# Altium PCB PCB.PcbDoc (part 1 of 3)
Units mm, origin at the board's own origin, x right, y up, seen from the top; angles counter-clockwise.
Board outline 116.97 x 81.03 mm, 4 copper layers (Top Layer, Int1 (GND), Int2 (PWR), Bottom Layer), stack 1.369 mm thick; 124 components, 94 nets, 431 pads, 1026 vias.
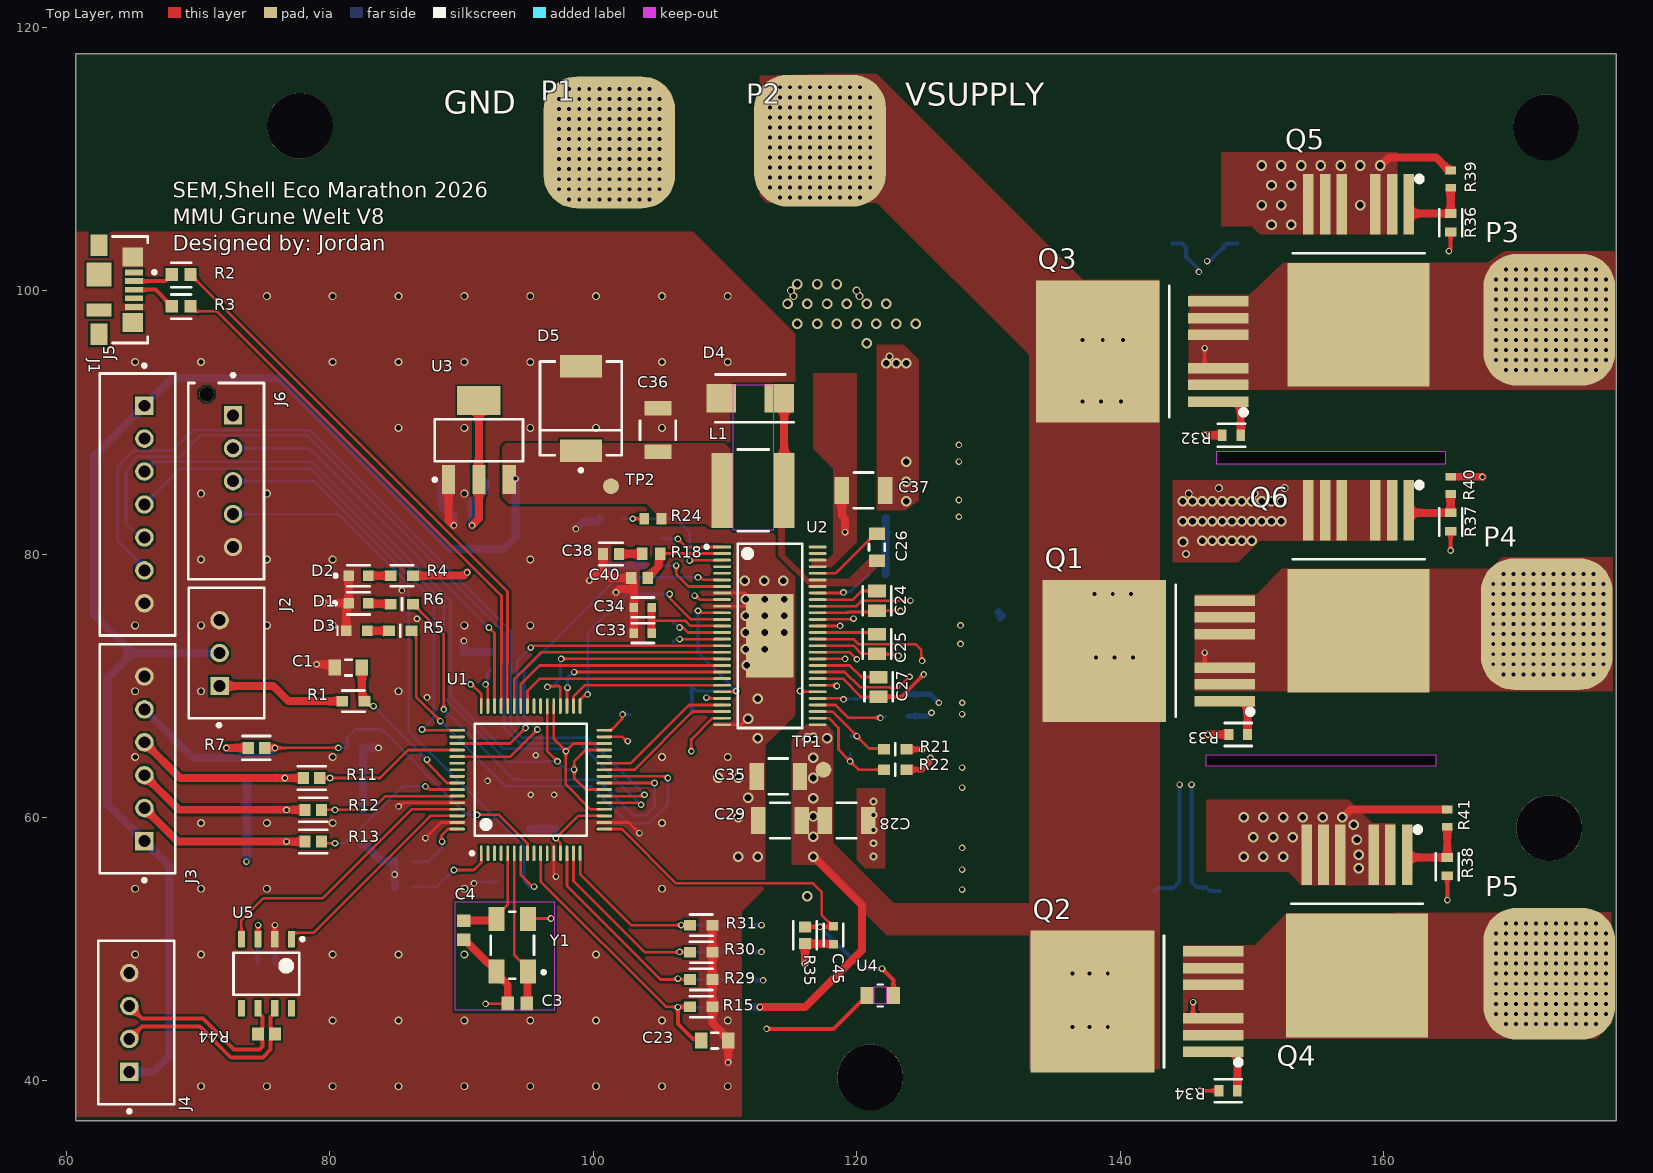
[diagram p0: Top Layer view]
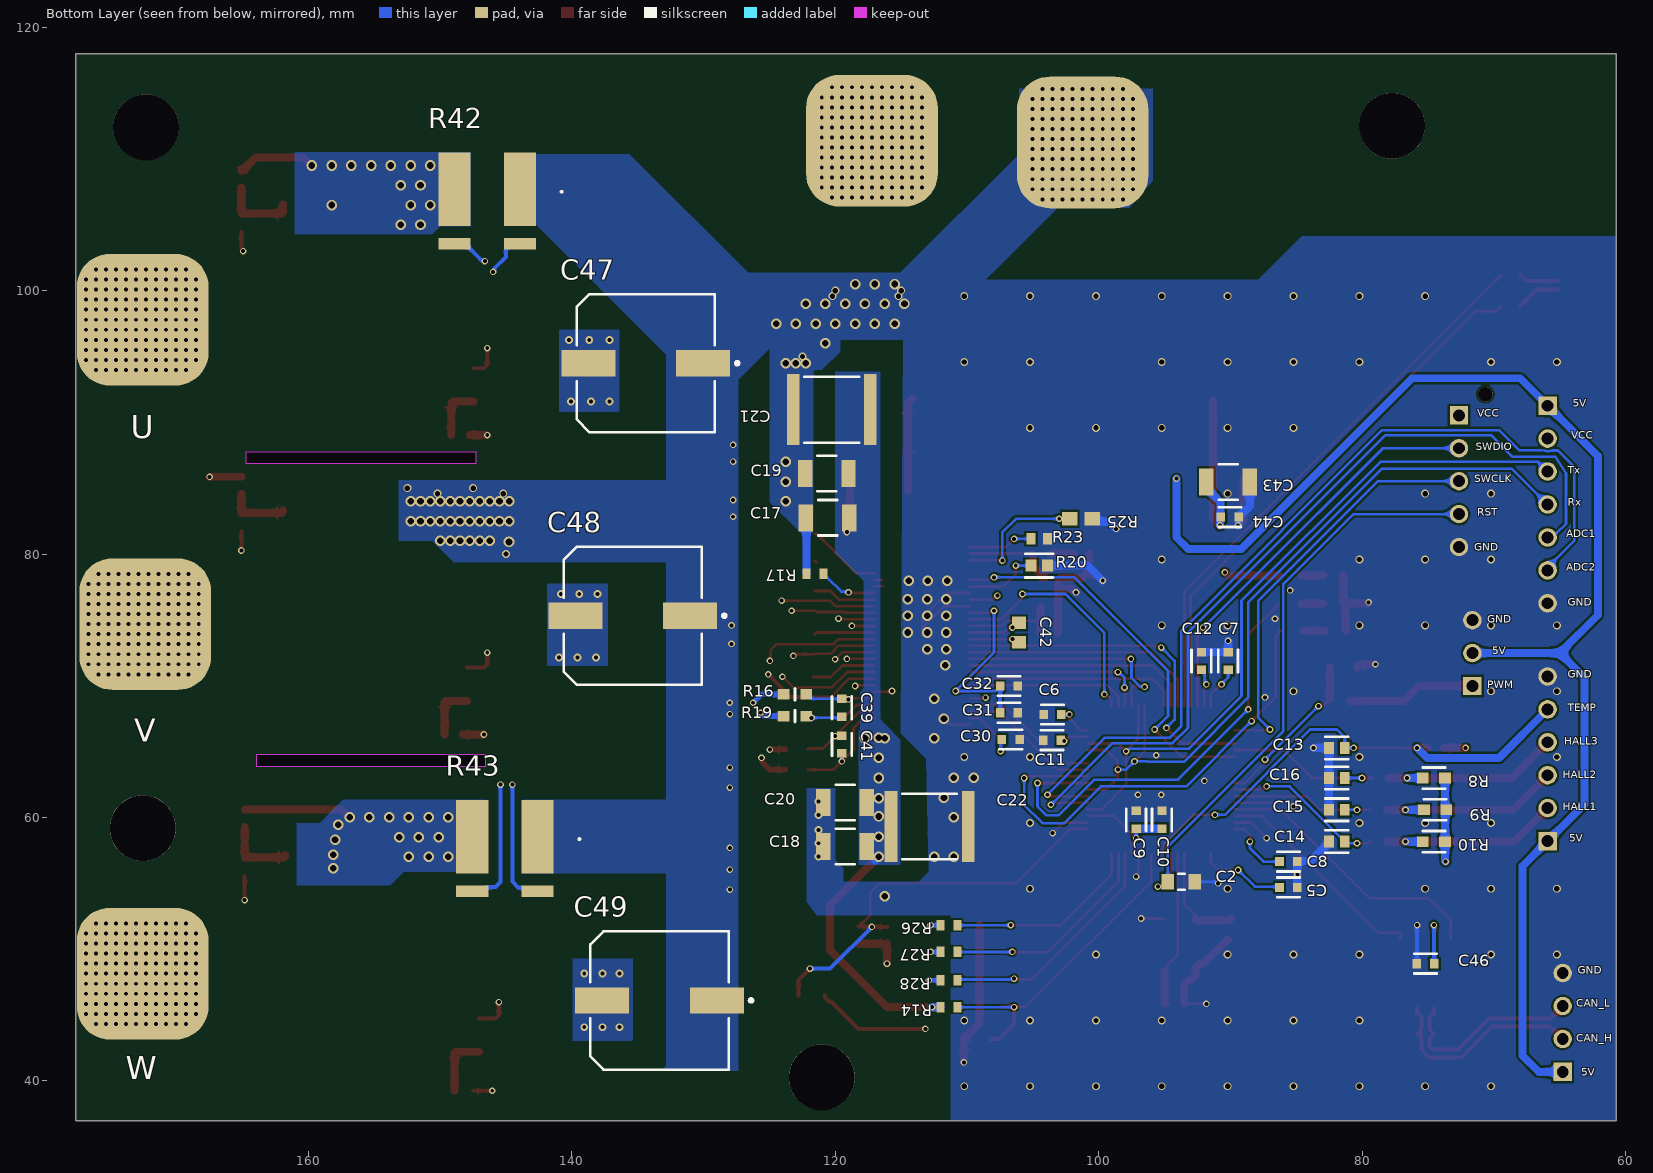
[diagram p1: Bottom Layer view, seen from below]
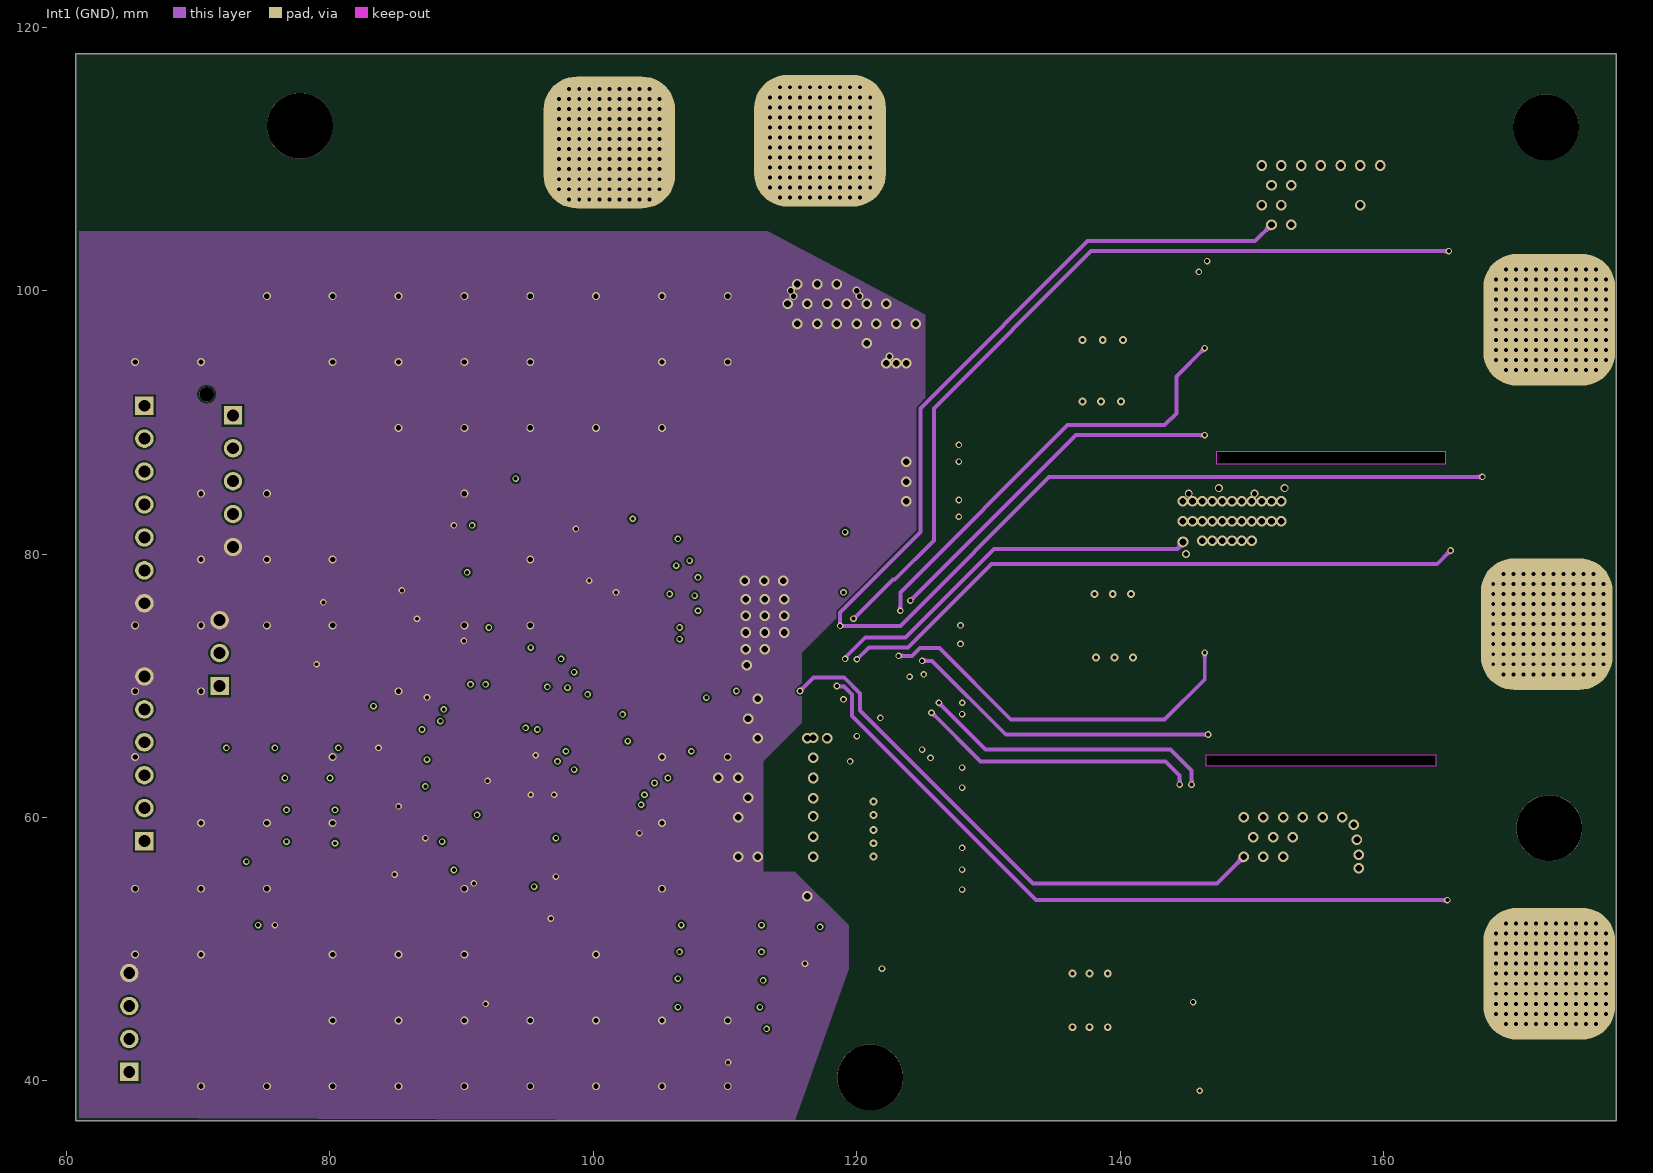
[diagram p2: Int1 (GND)]
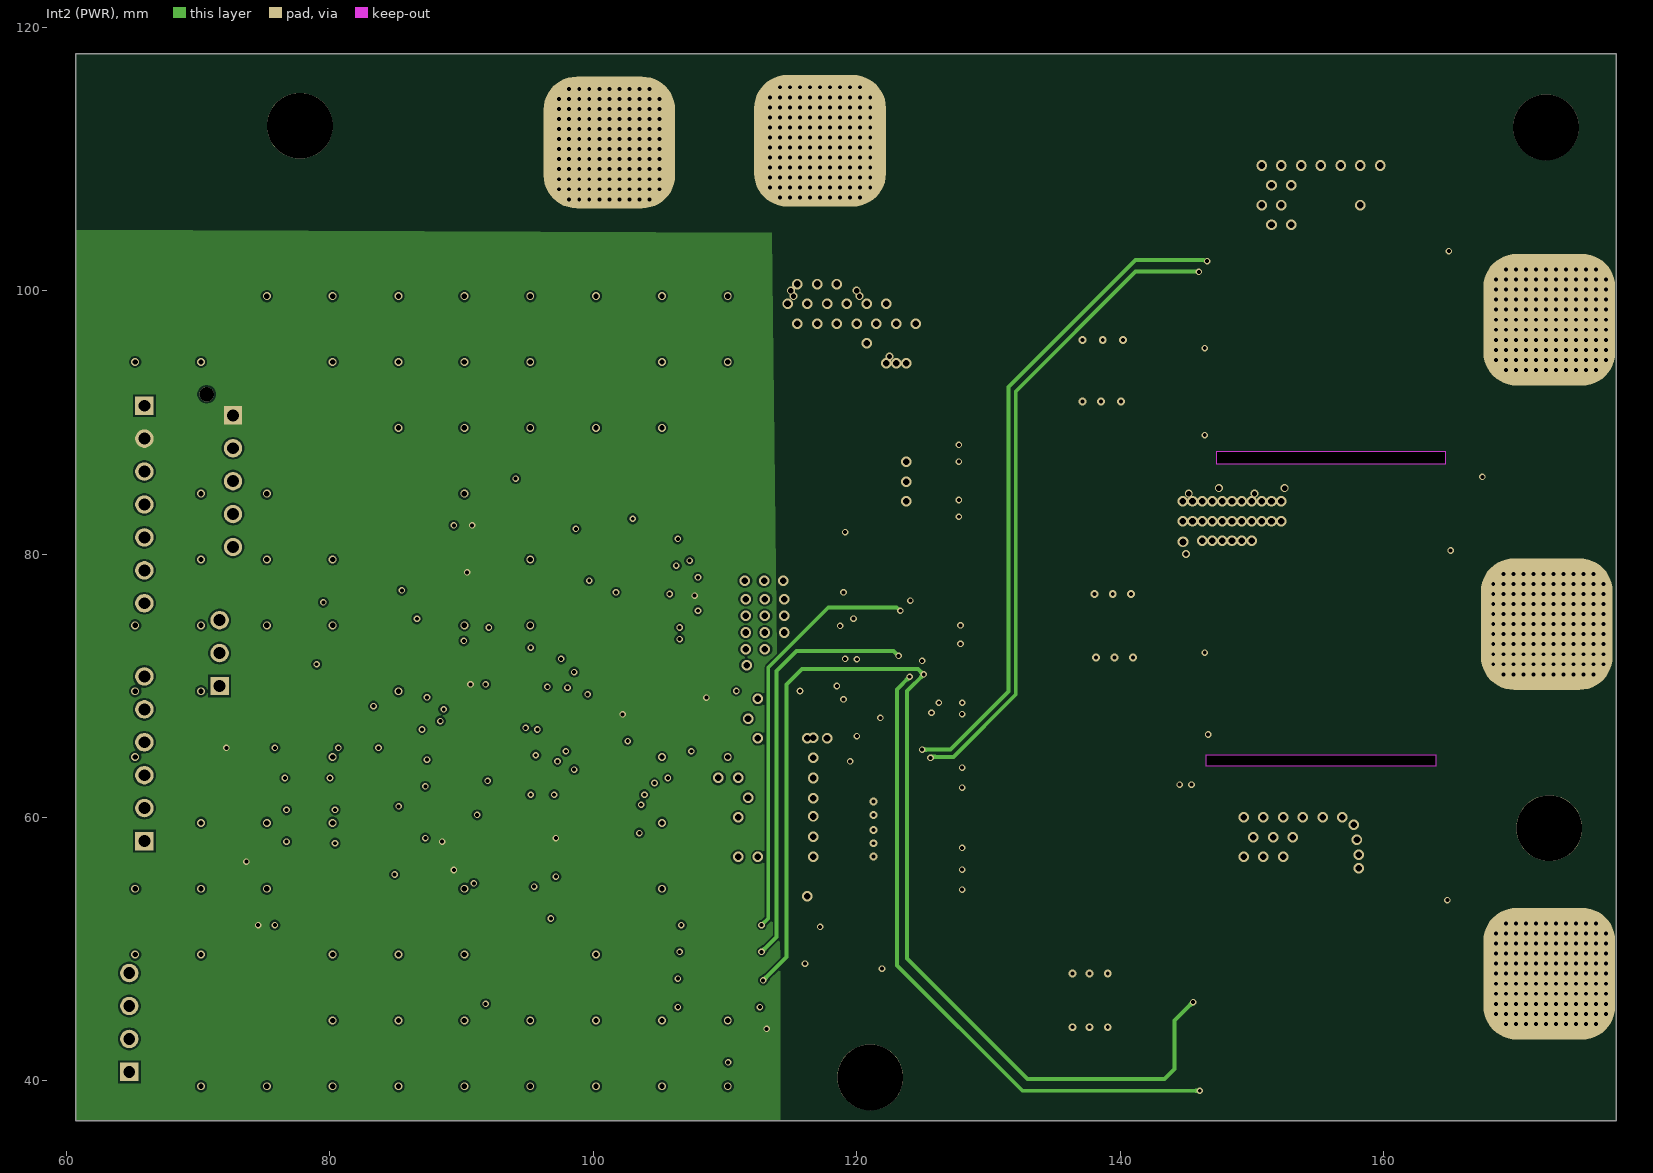
[diagram p3: Int2 (PWR)]
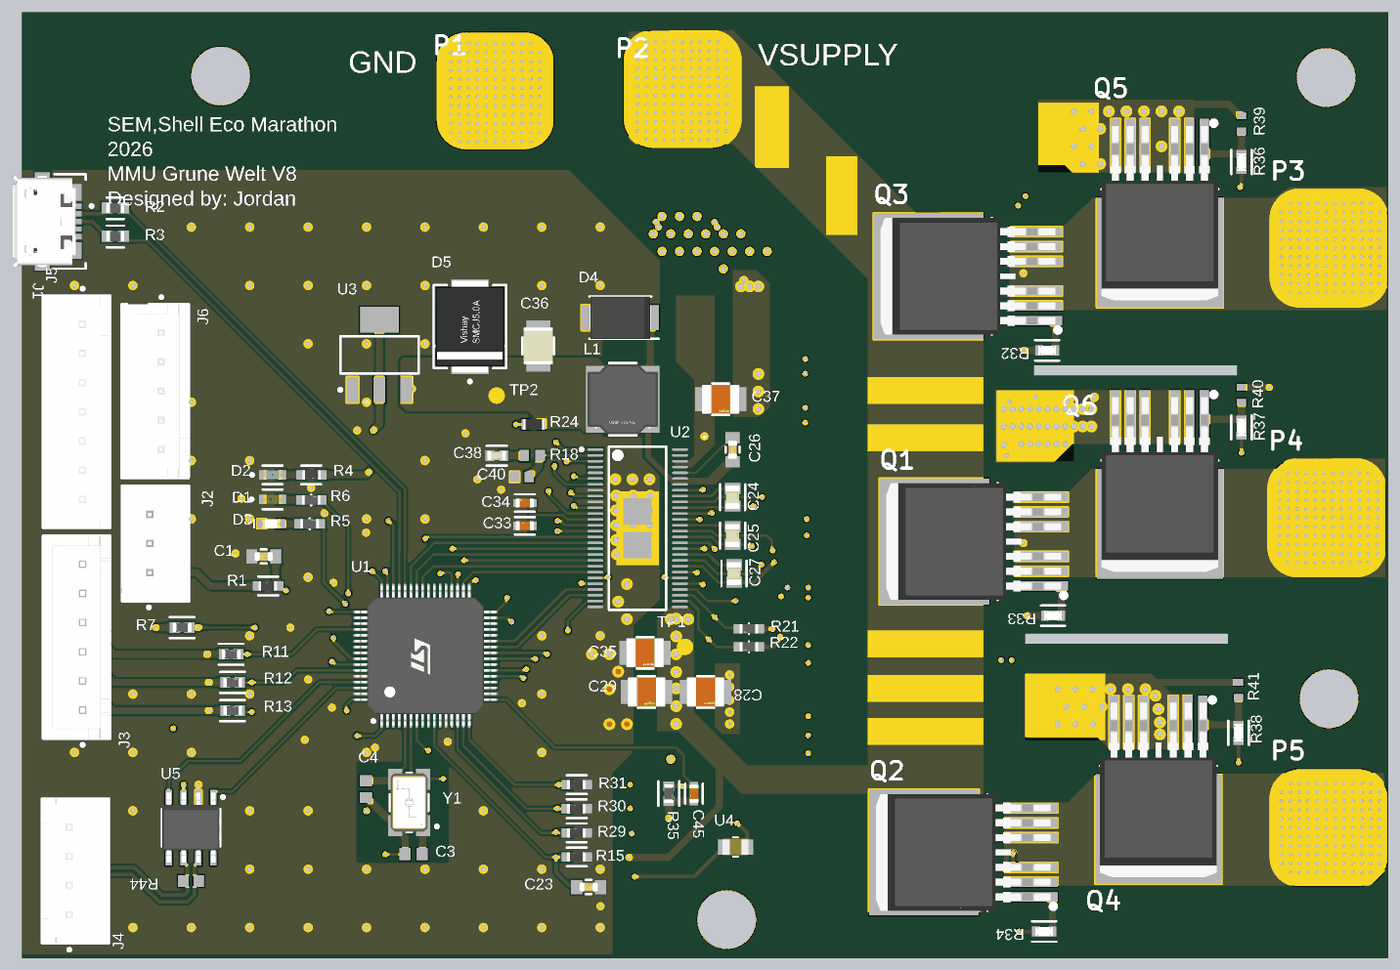
[diagram p5: 3D render of the assembled board from above, using the file's embedded part models]
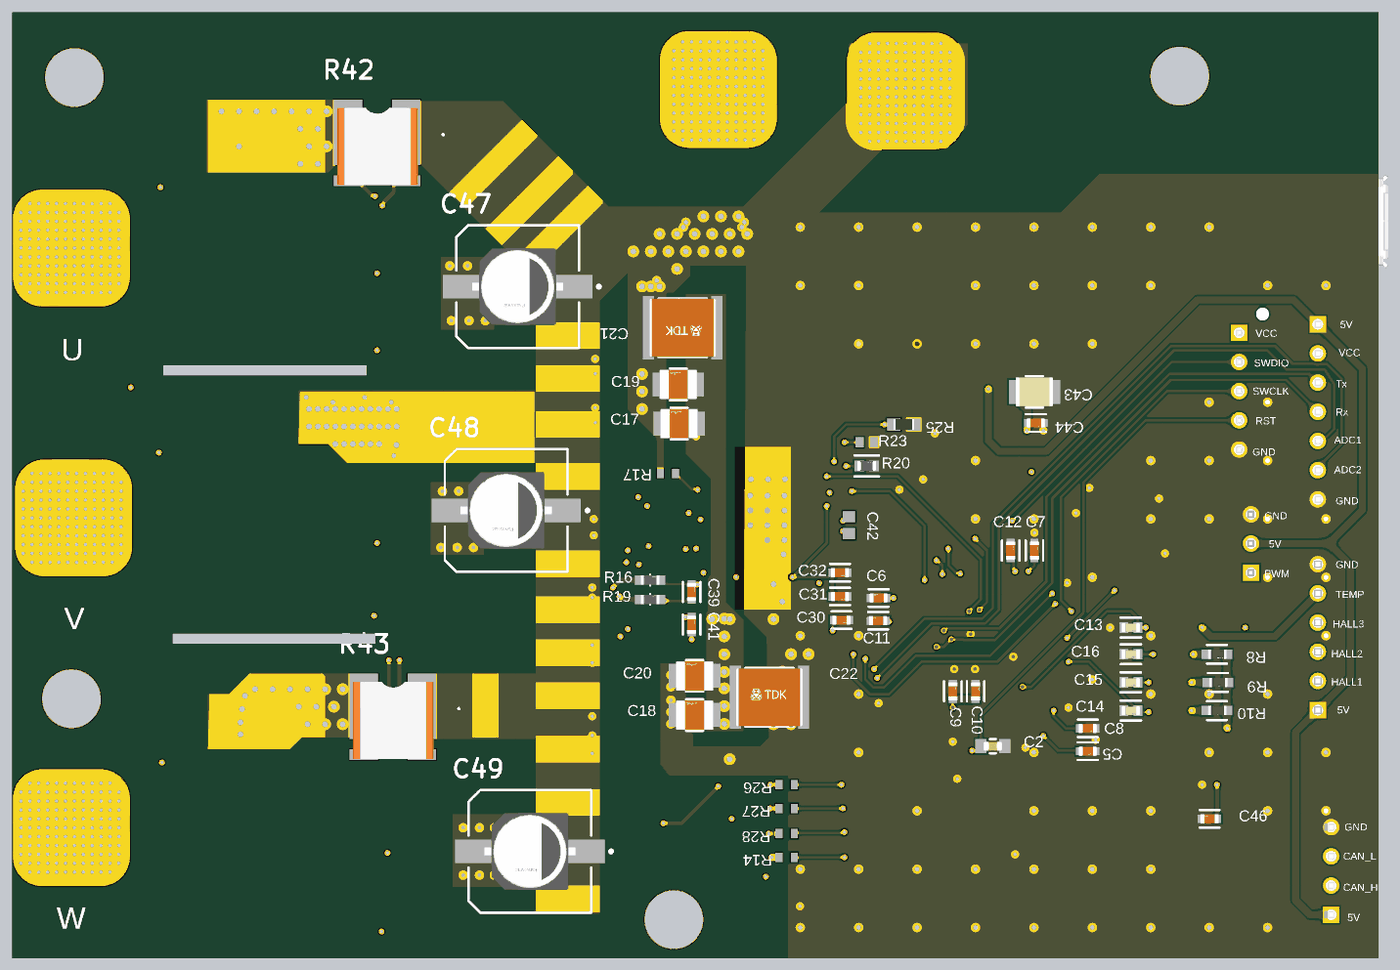
[diagram p6: 3D render of the assembled board from below, using the file's embedded part models]

## Layer stack, top to bottom
Top Solder: solder mask 0.0254, SM-001, Dk 4
Top Layer: signal copper 0.035
Dielectric 1: prepreg 0.1295, PP-017, Dk 4.3
Dielectric 2: prepreg 0.1295, PP-017, Dk 4.3
Int1 (GND): signal copper 0.035
Dielectric 3: core 0.7112, Core-039, Dk 4.8
Int2 (PWR): signal copper 0.035
Dielectric 4: prepreg 0.1295, PP-017, Dk 4.3
Dielectric 5: prepreg 0.1295, PP-017, Dk 4.3
Bottom Layer: signal copper 0.035
Bottom Solder: solder mask 0.0254, SM-001, Dk 4

## Board outline
60.706,36.957 177.673,36.957 177.673,117.983 60.706,117.983
cut-out: 146.558,64.77 163.957,64.77 163.957,63.881 146.558,63.881
cut-out: 164.719,87.757 147.32,87.757 147.32,86.868 164.719,86.868

## Design rules (kind name [scope] priority, off if disabled: settings)
Clearance [All] p1: gap=0.15 ignorepadtopadclearanceinfootprint=TRUE except(0.2: Fill-Fill Fill-Poly Fill-Region Poly-Poly Poly-Region Region-Region)
Creepage [All] p1: checkdistance=0.1 applytopolygonpour=TRUE
DiffPairsRouting [All] p1: maxlimit=0.6 minlimit=0.254 mostfreqgap=0.3 toplayer_minwidth=0.2 toplayer_maxwidth=0.4 toplayer_prefwidth=0.3 midlayer1_minwidth=0.2 midlayer1_maxwidth=0.4 midlayer1_prefwidth=0.3 midlayer2_minwidth=0.2 midlayer2_maxwidth=0.4 midlayer2_prefwidth=0.3 bottomlayer_minwidth=0.2 bottomlayer_maxwidth=0.4 bottomlayer_prefwidth=0.3 maxuncoupledlength=12.7
PlaneClearance [All] p1: clearance=0.6
PlaneConnect [All] p1: planeconnectstyle=Direct reliefexpansion=0.508 reliefentries=4 reliefconductorwidth=0.254 reliefairgap=0.254
PolygonConnect [All] p1: connectstyle=Direct reliefconductorwidth=0.254 reliefentries=4 polygonreliefangle="90 Angle" airgapwidth=0.2
RoutingVias [All] p1: holewidth=0.5 width=0.7 viastyle="Through Hole" minholewidth=0.3 minwidth=0.5 maxholewidth=0.7 maxwidth=1.27
SolderMaskExpansion [All] p1: expansion=0.102 istentingtop=FALSE
Width [All] p1: maxlimit=0.6 minlimit=0.2 preferedwidth=0.3
27 further rules are at their usual default settings.

## Classes and differential pairs
component class "Power Stage": C45 C47 C48 C49 Q1 Q2 Q3 Q4 Q5 Q6 R32 R33 R34 R35 R36 R37 R38 R39 R40 R41 R42 R43 U4
component class MCU: C2 C3 C4 C5 C6 C7 C8 C9 C10 C11 C12 U1 Y1
component class HALL_SENSOR_FILTER: C13 C14 C15 C16 R7 R8 R9 R10 R11 R12 R13
component class General: C1 D1 D2 D3 J1 J2 J3 J4 J5 J6 P1 P2 P3 P4 P5 R1 R2 R3 R4 R5 R6
component class "GATE Driver": C17 C18 C19 C20 C21 C22 C23 C24 C25 C26 C27 C28 C29 C30 C31 C32 C33 C34 C35 C36 C37 C38 C39 C40 C41 C42 C43 C44 D4 D5 L1 R14 R15 R16 R17 R18 R19 R20 R21 R22 R23 R24 R25 R26 R27 R28 R29 R30 R31 TP1 TP2 U2 U3
component class CAN: C46 R44 U5
differential pair USB: +USB_P -USB_N
differential pair CURR_2: +CURR_2_P -CURR_2_N
differential pair CURR_1: +CURR_1_P -CURR_1_N
differential pair CAN: +CAN_P -CAN_N

## Components (designator, comment, footprint, x,y, rotation, side; value= is the part's Value field where it differs from the comment)
C1 "CGA3E2X7R1H104K080AA" FP-CGA3E-0_3-0_1-IPC_A 81.407,71.374 r180 top
C2 "CGA3E2X7R1H104K080AA" FP-CGA3E-0_3-0_1-IPC_A 93.726,55.118 r180 bottom
C3 "GRM1885C1H150JA01D" CAPC1608X90X35ML10T15 94.234,45.863 r0 top
C4 "GRM1885C1H150JA01D" CAPC1608X90X35ML10T15 90.17,51.435 r90 top
C5 "GRM188R71A225KE15D" FP-GRM188-0_1-e0_2_0_5-MFG 85.598,54.688 r180 bottom
C6 "GRM188R71A225KE15D" FP-GRM188-0_1-e0_2_0_5-MFG 103.505,67.818 r0 bottom
C7 "GRM188R71A225KE15D" FP-GRM188-0_1-e0_2_0_5-MFG 90.17,71.882 r90 bottom
C8 "GRM188R71A225KE15D" FP-GRM188-0_1-e0_2_0_5-MFG 85.598,56.642 r180 bottom
C9 "GRM188R71A225KE15D" FP-GRM188-0_1-e0_2_0_5-MFG 97.155,59.817 r90 bottom
C10 "GRM188R71A225KE15D" FP-GRM188-0_1-e0_2_0_5-MFG 95.201,59.817 r90 bottom
C11 "GRM188R71A225KE15D" FP-GRM188-0_1-e0_2_0_5-MFG 103.545,65.864 r0 bottom
C12 "2u2" FP-GRM188-0_1-e0_2_0_5-MFG 92.202,71.882 r90 bottom
C13 "C0603C472J5RACTU" FP-C0603C-CF-MFG 81.915,65.278 r0 bottom value="4,700 pF"
C14 "C0603C472J5RACTU" FP-C0603C-CF-MFG 81.915,58.166 r0 bottom value="4,700 pF"
C15 "C0603C472J5RACTU" FP-C0603C-CF-MFG 81.915,60.579 r0 bottom value="4,700 pF"
C16 "C0603C472J5RACTU" FP-C0603C-CF-MFG 81.915,62.992 r0 bottom value="4,700 pF"
C17 "GRM32ER71J106KA12L" FP-GRM32E-0_2-0_3-MFG 120.579,82.752 r0 bottom
C18 "GRM32ER71J106KA12L" FP-GRM32E-0_2-0_3-MFG 119.253,57.785 r0 bottom
C19 "GRM32ER71J106KA12L" FP-GRM32E-0_2-0_3-MFG 120.65,86.106 r0 bottom
C20 "GRM32ER71J106KA12L" FP-GRM32E-0_2-0_3-MFG 119.253,61.139 r0 bottom
C21 "C5750X7S2A156M250KB" FP-C5750-250-0_4-IPC_B 120.269,90.962 r0 bottom
C22 "C5750X7S2A156M250KB" FP-C5750-250-0_4-IPC_B 112.847,59.309 r180 bottom
C23 "CGA3E2X7R1H104K080AA" FP-CGA3E-0_3-0_1-IPC_A 109.22,43.053 r0 top
C24 "C0805C224K1RACTU" FP-C0805C-DN-MFG 121.539,76.442 r270 top value="0.22 μF"
C25 "C0805C224K1RACTU" FP-C0805C-DN-MFG 121.539,73.164 r270 top value="0.22 μF"
C26 "CGA3E2X7R1H104K080AA" FP-CGA3E-0_3-0_1-IPC_A 121.539,80.518 r270 top
C27 "C0805C224K1RACTU" FP-C0805C-DN-MFG 121.666,69.91 r270 top value="0.22 μF"
C28 "GRM32ER71J106KA12L" FP-GRM32E-0_2-0_3-MFG 119.227,59.765 r0 top
C29 "GRM32ER71J106KA12L" FP-GRM32E-0_2-0_3-MFG 114.173,59.765 r0 top
C30 "GRM188R71A225KE15D" FP-GRM188-0_1-e0_2_0_5-MFG 106.68,65.913 r180 bottom
C31 "GRM188R71A225KE15D" FP-GRM188-0_1-e0_2_0_5-MFG 106.807,67.945 r180 bottom
C32 "GRM188R71A225KE15D" FP-GRM188-0_1-e0_2_0_5-MFG 106.807,69.977 r180 bottom
C33 "GRM188R71A225KE15D" FP-GRM188-0_1-e0_2_0_5-MFG 103.759,73.992 r180 top
C34 "GRM188R71A225KE15D" FP-GRM188-0_1-e0_2_0_5-MFG 103.759,75.946 r180 top
C35 "GRM32ER71J106KA12L" FP-GRM32E-0_2-0_3-MFG 114.047,63.119 r0 top
C36 "GRM32ER60J107ME20L" FP-GRM32-0_3-MFG 104.902,89.408 r90 top value=100uF
C37 "GRM32ER71J106KA12L" FP-GRM32E-0_2-0_3-MFG 120.523,84.836 r0 top
C38 "C0603C682J5GACTU" FP-C0603C-CF-MFG 101.346,80.01 r180 top value="6,800 pF"
C39 "GRM1885C1H222JA01D" FP-GRM188-0_1-e0_2_0_5-MFG 119.507,68.326 r90 bottom
C40 "C0603C121J5GACTU" CAPC1608X87X35LL15T15 103.505,78.181 r180 top
C41 "GRM1885C1H222JA01D" FP-GRM188-0_1-e0_2_0_5-MFG 119.507,65.532 r90 bottom
C42 "GRM188R71H223KA01D" CAPC1608X90X35ML10T15 106.045,74.041 r90 bottom
C43 "GRM32ER60J107ME20L" FP-GRM32-0_3-MFG 90.17,85.471 r180 bottom value=100uF
C44 "GRM188R71A225KE15D" FP-GRM188-0_1-e0_2_0_5-MFG 90.043,82.804 r180 bottom
C45 "2u2" FP-GRM188-0_1-e0_2_0_5-MFG 118.237,51.054 r270 top
C46 "GRM188R71A225KE15D" FP-GRM188-0_1-e0_2_0_5-MFG 75.184,48.895 r0 bottom
C47 "EEEFK1J101P" FP-FKG-MFG 134.398,94.488 r0 bottom
C48 "EEEFK1J101P" FP-FKG-MFG 135.382,75.311 r0 bottom
C49 "EEEFK1J101P" FP-FKG-MFG 133.35,46.101 r0 bottom
D1 "LTST-C190GKT" FP-LTST-C190GKT-MFG 82.169,76.255 r0 top
D2 "LTST-C191TBKT" FP-LTST-C191TBKT-MFG 82.169,78.359 r0 top
D3 "150060RS75000" WL-SMCW_0603_150060xx75000 82.042,74.168 r0 top
D4 "B280-13-F" DIOM5336X250N 111.928,91.821 r180 top
D5 "SMCJ5.0A-E3/57T" FP-95402-MFG 99.06,91.059 r90 top
J1 "473460001" FP-473460001-MFG 62.82,100.069 r270 top
J2 "B3B-XH-A(LF)(SN)" FP-B3B-XH-A_LF_SN-MFG 72.153,72.477 r90 top
J3 "B6B-XH-A(LF)(SN)" FP-B6B-XH-A_LF_SN-MFG 65.388,64.456 r90 top
J4 "B4B-XH-A(LF)(SN)" FP-B4B-XH-A_LF_SN-MFG 65.295,44.43 r270 top
J5 "B7B-XH-A(LF)(SN)" FP-B7B-XH-A_LF_SN-MFG 65.388,83.761 r90 top
J6 "B5B-XH-AM(LF)(SN)" FP-B5B-XH-AM_LF_SN-MFG 72.119,85.531 r90 top
L1 "NR6045T220M" FP-NR6045-MFG 112.141,84.836 r180 top
P1 "Power_Pad" POWERPAD 101.219,111.252 r0 top
P2 "Power_Pad" POWERPAD 117.221,111.379 r0 top
P3 "Power_Pad" POWERPAD 172.593,97.79 r90 top
P4 "Power_Pad" POWERPAD 172.403,74.676 r90 top
P5 "Power_Pad" POWERPAD 172.593,48.133 r90 top
Q1 "IPB010N06N" PG-TO263-7-3_3 138.805,72.644 r90 top
Q2 "IPB010N06N" PG-TO263-7-3_3 137.916,46.015 r90 top
Q3 "IPB010N06N" PG-TO263-7-3_3 138.303,95.377 r90 top
Q4 "IPB010N06N" PG-TO263-7-3_3 157.988,48.006 r180 top
Q5 "IPB010N06N" PG-TO263-7-3_3 158.115,97.409 r180 top
Q6 "IPB010N06N" PG-TO263-7-3_3 158.115,74.168 r180 top
R1 "RT0603BRD072K2L" FP-RT0603-MFG 81.788,68.834 r180 top value=2.2KΩ
R2 "CRCW060322R0FKEA" FP-CRCW0603-e3-IPC_B 68.707,101.219 r0 top
R3 "CRCW060322R0FKEA" FP-CRCW0603-e3-IPC_B 68.707,98.806 r0 top
R4 "RT0603BRD072K2L" FP-RT0603-MFG 85.471,78.359 r0 top value=2.2KΩ
R5 "RC0603FR-07100RL" FP-RC0603-0_55-MFG 85.344,74.168 r0 top
R6 "RC0603FR-07100RL" FP-RC0603-0_55-MFG 85.471,76.2 r0 top
R7 "ERA-3AEB103V" FP-ERA3A-IPC_C 74.422,65.278 r180 top
R8 "RT0603BRD072K2L" FP-RT0603-MFG 74.549,62.992 r180 bottom value=2.2KΩ
R9 "RT0603BRD072K2L" FP-RT0603-MFG 74.461,60.579 r180 bottom value=2.2KΩ
R10 "RT0603BRD072K2L" FP-RT0603-MFG 74.549,58.166 r180 bottom value=2.2KΩ
R11 "ERA-3AEB103V" FP-ERA3A-IPC_C 78.613,62.992 r0 top
R12 "ERA-3AEB103V" FP-ERA3A-IPC_C 78.74,60.579 r0 top
R13 "ERA-3AEB103V" FP-ERA3A-IPC_C 78.74,58.166 r0 top
R14 "RC0603FR-0739KL" RESC1608X55X25LL10T15 111.379,45.593 r0 bottom
R15 "RT0603BRD072K2L" FP-RT0603-MFG 108.204,45.624 r180 top value=2.2KΩ
R16 "RC0603FR-07100RL" FP-RC0603-0_55-MFG 123.063,69.342 r180 bottom
R17 "RC0603FR-071ML" RESC1608X55X25LL10T15 121.539,78.486 r0 bottom
R18 "ERJ-3EKF1502V" RESC1608X55X30NL15T15 104.394,80.01 r180 top
R19 "RC0603FR-07100RL" FP-RC0603-0_55-MFG 123.063,67.691 r180 bottom
R20 "ERA-3AEB103V" FP-ERA3A-IPC_C 104.521,79.121 r180 bottom
R21 "RC0603FR-07100RL" FP-RC0603-0_55-MFG 122.936,65.181 r180 top
R22 "RC0603FR-07100RL" FP-RC0603-0_55-MFG 122.936,63.627 r180 top
R23 "ERJ-3GEYJ224V" RESC1608X55X30LL15T15#1 104.521,81.153 r180 bottom
R24 "ERJ3EKF1802V" RESC1608X55X30LL15T15#2 104.521,82.677 r0 top
R25 "ERJ-3EKF3301V" RESC1609X55X30ML15T15 101.346,82.677 r0 bottom
R26 "RC0603FR-0739KL" RESC1608X55X25LL10T15 111.379,51.816 r0 bottom
R27 "RC0603FR-0739KL" RESC1608X55X25LL10T15 111.379,49.784 r0 bottom
R28 "RC0603FR-0739KL" RESC1608X55X25LL10T15 111.379,47.625 r0 bottom
R29 "RT0603BRD072K2L" FP-RT0603-MFG 108.204,47.693 r180 top value=2.2KΩ
R30 "RT0603BRD072K2L" FP-RT0603-MFG 108.204,49.754 r180 top value=2.2KΩ
R31 "RT0603BRD072K2L" FP-RT0603-MFG 108.204,51.816 r180 top value=2.2KΩ
R32 "ERJ-PA3J4R7V" FP-ERJPA3-IPC_C 148.463,89.027 r0 top
R33 "ERJ-PA3J4R7V" FP-ERJPA3-IPC_C 148.971,66.294 r0 top
R34 "4R7" FP-ERJPA3-IPC_C 148.209,39.243 r0 top
R35 "10k" FP-ERA3A-IPC_C 116.078,51.054 r270 top
R36 "ERJ-PA3J4R7V" FP-ERJPA3-IPC_C 165.1,105.156 r90 top
R37 "ERJ-PA3J4R7V" FP-ERJPA3-IPC_C 165.1,82.423 r90 top
R38 "ERJ-PA3J4R7V" FP-ERJPA3-IPC_C 164.846,56.261 r90 top
R39 "RC0603FR-0739KL" RESC1608X55X25LL10T15 165.1,108.458 r90 top
R40 "RC0603FR-0739KL" RESC1608X55X25LL10T15 165.1,85.217 r270 top
R41 "RC0603FR-0739KL" RESC1608X55X25LL10T15 164.846,59.944 r90 top
R42 "WSLP27265L000FEA" WSLP27265L000FEA 146.431,106.807 r0 bottom
R43 "WSLP27265L000FEA" WSLP27265L000FEA 145.086,57.645 r0 bottom
R44 "ERA-3AEB121V" RESC1608X55X30NL20T20 75.184,43.561 r180 top
TP1 "Test point" "TEST POINT" 111.887,66.421 r90 top
TP2 "Test point" "TEST POINT" 95.758,87.947 r90 top
U1 "STM32F405RGT6TR" FP-LQFP64-5W-IPC_C 95.25,62.865 r90 top
U2 "DRV8302DCAR" FP-DCA0056A-IPC_C 113.411,73.787 r0 top
U3 "TC2117-3.3VDBTR" SOT-223-DB3_N 91.313,88.646 r90 top
U4 "NTCS0805E3103GMT" NTCS0805_VIS 121.793,46.482 r180 top
U5 "SN65HVD232D" D0008A_L 75.184,48.133 r270 top
Y1 "ABM3B-8.000MHZ-10-1-U-T" FP-ABM3B-MFG 93.853,50.292 r90 top

## Footprints (in the part's own frame and the unit in brackets; to place one, negate y for a bottom-side part, rotate by r counter-clockwise, add the part's x,y. Pads: shape width x height; smd on the part's side, far side on the other; paste and mask are expansions set on the pad)
CAPC1608X87X35LL15T15 [mm] "Chip Capacitor, 2-Leads, Body 1.60x0.80mm, IPC High Density"
  rect 0.8x0.9 smd: 1(-0.625,0) 2(0.625,0)
  body extent -0.87,-0.48 0.87,0.48, height 0.87
CAPC1608X90X35ML10T15 [mm] "Chip Capacitor, 2-Leads, Body 1.60x0.80mm, IPC Low Density"
  rect 0.95x1.05 smd: 1(-0.725,0) 2(0.725,0)
  body extent -0.85,-0.45 0.85,0.45, height 0.9
D0008A_L [mm] "SOIC, 8-Leads, Body 5x4mm, Pitch 1.27mm, IPC High Density"
  rrect18% 1.25x0.55 smd: 1(-2.625,1.905) 2(-2.625,0.635) 3(-2.625,-0.635) 4(-2.625,-1.905) 5(2.625,-1.905) 6(2.625,-0.635) 7(2.625,0.635) 8(2.625,1.905)
  silkscreen extent -2.75,-2.5 1.6,2.86, body extent -3,-2.45 3,2.45, height 1.63
DIOM5336X250N [mm]
  rect 2.25x2.15 smd: 1(-2.2,0) 2(2.2,0)
  silkscreen extent -3.27,-1.81 2.65,1.81, body extent -2.65,-1.81 2.65,1.81, height 2.5
FP-95402-MFG [mm]
  rect 1.72x3.2 smd paste+0 mask+0: 1(-3.205,0) 2(3.205,0)
  silkscreen extent -4.82,-3.11 3.55,3.11, body extent -4.17,-3.21 4.17,3.21, height 0.25
FP-473460001-MFG [mm]
  rect 0.45x1.38 smd paste+0 mask+0: 1(-1.3,2.31) 2(-0.65,2.31) 3(0,2.31) 4(0.65,2.31) 5(1.3,2.31)
  rect 1.425x1.55 smd paste+0 mask+0: 6(-2.488,2.225) 7(2.488,2.225)
  rect 1.65x1.3 smd paste+0 mask+0: 8(-3.375,-0.35) 11(3.375,-0.35)
  rect 1.8x1.9 smd paste+0 mask+0: 9(-1.15,-0.35)
  rect 1x1.9 smd paste+0 mask+0: 10(1.55,-0.35)
  silkscreen extent -4.05,0.67 4.05,3.98, body extent -4.3,-2.48 4.3,3.45, height 0.25
FP-ABM3B-MFG [mm]
  rect 1.8x1.2 smd paste+0 mask+0: 1(-2,-1.2) 2(2,-1.2) 3(2,1.2) 4(-2,1.2)
  silkscreen extent -2.55,-2.5 2.55,1.65, body extent -3,-1.9 3,1.9, height 0.25
FP-B3B-XH-A_LF_SN-MFG [mm]
  rect 1.4x1.4 hole 0.9 paste-2539.97 mask+0: 1(-2.5,0.525)
  round 1.4 hole 0.9 paste-2539.97 mask+0: 2(0,0.525) 3(2.5,0.525)
  silkscreen extent -5.6,-2.88 4.95,2.88, body extent -5.05,-2.98 5.05,2.98, height 0.25
FP-B4B-XH-A_LF_SN-MFG [mm]
  rect 1.4x1.4 hole 0.9 paste-2539.97 mask+0: 1(3.75,-0.525)
  round 1.4 hole 0.9 paste-2539.97 mask+0: 2(1.25,-0.525) 3(-1.25,-0.525) 4(-3.75,-0.525)
  silkscreen extent -6.2,-2.88 6.87,2.88, body extent -6.3,-2.98 6.3,2.98, height 0.25
FP-B5B-XH-AM_LF_SN-MFG [mm]
  rect 1.4x1.4 hole 0.9 paste-2539.97 mask+0: 1(5,-0.525)
  round 1.4 hole 0.9 paste-2539.97 mask+0: 2(2.5,-0.525) 3(0,-0.525) 4(-2.5,-0.525) 5(-5,-0.525)
  round 1.1 hole 1.1 unplated paste-2539.97 mask+0: ""(6.6,1.475)
  silkscreen extent -7.45,-2.88 8.17,2.88, body extent -7.55,-2.98 7.55,2.98, height 0.25
FP-B6B-XH-A_LF_SN-MFG [mm]
  rect 1.4x1.4 hole 0.9 paste-2539.97 mask+0: 1(-6.25,-0.525)
  round 1.4 hole 0.9 paste-2539.97 mask+0: 2(-3.75,-0.525) 3(-1.25,-0.525) 4(1.25,-0.525) 5(3.75,-0.525) 6(6.25,-0.525)
  silkscreen extent -9.35,-2.88 8.7,2.88, body extent -8.8,-2.98 8.8,2.98, height 0.25
FP-B7B-XH-A_LF_SN-MFG [mm]
  rect 1.4x1.4 hole 0.9 paste-2539.97 mask+0: 1(7.5,-0.525)
  round 1.4 hole 0.9 paste-2539.97 mask+0: 2(5,-0.525) 3(2.5,-0.525) 4(0,-0.525) 5(-2.5,-0.525) 6(-5,-0.525) 7(-7.5,-0.525)
  silkscreen extent -9.95,-2.88 10.67,2.88, body extent -10.05,-2.98 10.05,2.98, height 0.25
FP-C0603C-CF-MFG [mm]
  rect 0.75x0.9 smd paste+0 mask+0: 1(-0.6,0) 2(0.6,0)
  silkscreen extent -0.87,-0.85 0.88,0.85, body extent -0.8,-0.4 0.8,0.4, height 0.87
FP-C0805C-DN-MFG [mm]
  rect 0.95x1.35 smd paste+0 mask+0: 1(-0.75,0) 2(0.75,0)
  silkscreen extent -1.1,-1.07 1.1,1.07, body extent -1.4,-0.85 1.4,0.85, height 0.25
FP-C5750-250-0_4-IPC_B [mm]
  rect 0.953x5.403 smd paste+0 mask+0: 1(-2.925,0) 2(2.925,0)
  silkscreen extent -2.07,-2.5 2.07,2.5, body extent -2.85,-2.5 2.85,2.5, height 2.81
FP-CGA3E-0_3-0_1-IPC_A [mm]
  rect 0.956x1.206 smd paste+0 mask+0: 1(-1.025,0) 2(1.025,0)
  silkscreen extent -0.25,-0.6 0.25,0.6, body extent -2,-1.1 2,1.1, height 0.25
FP-CRCW0603-e3-IPC_B [mm]
  rect 0.935x0.962 smd paste+0 mask+0: 1(-0.715,0) 2(0.715,0)
  silkscreen extent -0.75,-0.95 0.75,0.9, body extent -1.43,-0.73 1.43,0.73, height 0.25
FP-DCA0056A-IPC_C [mm]
  rect 1.355x0.212 smd paste+0 mask+0: 1(-3.625,6.75)
  rrect100% 1.355x0.212 smd paste+0 mask+0: 2(-3.625,6.25) 3(-3.625,5.75) 4(-3.625,5.25) 5(-3.625,4.75) 6(-3.625,4.25) 7(-3.625,3.75) 8(-3.625,3.25) 9(-3.625,2.75) 10(-3.625,2.25) 11(-3.625,1.75) 12(-3.625,1.25) 13(-3.625,0.75) 14(-3.625,0.25) 15(-3.625,-0.25) 16(-3.625,-0.75) 17(-3.625,-1.25) 18(-3.625,-1.75) 19(-3.625,-2.25) 20(-3.625,-2.75) 21(-3.625,-3.25) 22(-3.625,-3.75) 23(-3.625,-4.25) 24(-3.625,-4.75) 25(-3.625,-5.25) 26(-3.625,-5.75) 27(-3.625,-6.25) 28(-3.625,-6.75) 29(3.625,-6.75) 30(3.625,-6.25) 31(3.625,-5.75) 32(3.625,-5.25) 33(3.625,-4.75) 34(3.625,-4.25) 35(3.625,-3.75) 36(3.625,-3.25) 37(3.625,-2.75) 38(3.625,-2.25) 39(3.625,-1.75) 40(3.625,-1.25) 41(3.625,-0.75) 42(3.625,-0.25) 43(3.625,0.25) 44(3.625,0.75) 45(3.625,1.25) 46(3.625,1.75) 47(3.625,2.25) 48(3.625,2.75) 49(3.625,3.25) 50(3.625,3.75) 51(3.625,4.25) 52(3.625,4.75) 53(3.625,5.25) 54(3.625,5.75) 55(3.625,6.25) 56(3.625,6.75)
  rect 3.61x6.35 smd paste-1000 mask+0: 57(0,0)
  silkscreen extent -4.93,-7 2.45,7
FP-ERA3A-IPC_C [mm]
  rect 0.855x0.906 smd paste+0 mask+0: 1(-0.626,0) 2(0.626,0)
  silkscreen extent -1.05,-0.9 1.05,0.9, body extent -1.15,-0.6 1.15,0.6, height 0.25
FP-ERJPA3-IPC_C [mm]
  rect 0.657x0.862 smd paste+0 mask+0: 1(-0.701,0) 2(0.701,0)
  silkscreen extent -1.03,-0.87 1.03,0.87, body extent -1.13,-0.58 1.13,0.58, height 0.25
FP-FKG-MFG [mm]
  rect 4.1x2 smd paste+0 mask+0: 1(-4.35,0) 2(4.35,0)
  silkscreen extent -7.07,-5.25 5.25,5.25, body extent -3.9,-3.3 3.9,3.3, height 6.1
FP-GRM32-0_3-MFG [mm]
  rect 1.1x2.05 smd paste+0 mask+0: 1(-1.65,0) 2(1.65,0)
  silkscreen extent -0.72,-1.35 0.72,1.35, body extent -2.3,-1.45 2.3,1.45, height 0.25
FP-GRM32E-0_2-0_3-MFG [mm]
  rect 1.1x2.05 smd paste+0 mask+0: 1(-1.65,0) 2(1.65,0)
  silkscreen extent -0.72,-1.35 0.72,1.35, body extent -1.6,-1.25 1.6,1.25, height 2.8
FP-GRM188-0_1-e0_2_0_5-MFG [mm]
  rect 0.65x0.7 smd paste+0 mask+0: 1(-0.675,0) 2(0.675,0)
  silkscreen extent -0.85,-0.75 0.85,0.75, body extent -0.8,-0.4 0.8,0.4, height 0.9
FP-LQFP64-5W-IPC_C [mm]
  rect 1.188x0.212 smd paste+0 mask+0: 1(-5.591,3.75)
  rrect100% 1.188x0.212 smd paste+0 mask+0: 2(-5.591,3.25) 3(-5.591,2.75) 4(-5.591,2.25) 5(-5.591,1.75) 6(-5.591,1.25) 7(-5.591,0.75) 8(-5.591,0.25) 9(-5.591,-0.25) 10(-5.591,-0.75) 11(-5.591,-1.25) 12(-5.591,-1.75) 13(-5.591,-2.25) 14(-5.591,-2.75) 15(-5.591,-3.25) 16(-5.591,-3.75) 33(5.591,-3.75) 34(5.591,-3.25) 35(5.591,-2.75) 36(5.591,-2.25) 37(5.591,-1.75) 38(5.591,-1.25) 39(5.591,-0.75) 40(5.591,-0.25) 41(5.591,0.25) 42(5.591,0.75) 43(5.591,1.25) 44(5.591,1.75) 45(5.591,2.25) 46(5.591,2.75) 47(5.591,3.25) 48(5.591,3.75)
  rrect100% 0.212x1.188 smd paste+0 mask+0: 17(-3.75,-5.591) 18(-3.25,-5.591) 19(-2.75,-5.591) 20(-2.25,-5.591) 21(-1.75,-5.591) 22(-1.25,-5.591) 23(-0.75,-5.591) 24(-0.25,-5.591) 25(0.25,-5.591) 26(0.75,-5.591) 27(1.25,-5.591) 28(1.75,-5.591) 29(2.25,-5.591) 30(2.75,-5.591) 31(3.25,-5.591) 32(3.75,-5.591) 49(3.75,5.591) 50(3.25,5.591) 51(2.75,5.591) 52(2.25,5.591) 53(1.75,5.591) 54(1.25,5.591) 55(0.75,5.591) 56(0.25,5.591) 57(-0.25,5.591) 58(-0.75,5.591) 59(-1.25,5.591) 60(-1.75,5.591) 61(-2.25,5.591) 62(-2.75,5.591) 63(-3.25,5.591) 64(-3.75,5.591)
  silkscreen extent -5.72,-4.25 4.25,4.58, body extent -6.29,-6.29 6.29,6.29, height 0.25
FP-LTST-C190GKT-MFG [mm]
  rect 0.8x0.8 smd paste+0 mask+0: 1(-0.75,0) 2(0.75,0)
  silkscreen extent -1.92,-0.85 0.85,0.85, body extent -1.25,-0.55 1.25,0.55, height 0.25
FP-LTST-C191TBKT-MFG [mm]
  rect 0.8x0.8 smd paste+0 mask+0: 1(-0.75,0) 2(0.75,0)
  silkscreen extent -1.87,-0.8 0.85,0.8, body extent -1.25,-0.55 1.25,0.55, height 0.25
FP-NR6045-MFG [mm]
  rect 1.6x5.7 smd paste+0 mask+0: 1(-2.35,0) 2(2.35,0)
  silkscreen extent -1.17,-3.1 1.17,3.1, body extent -3.25,-3.2 3.25,3.2, height 0.25
FP-RC0603-0_55-MFG [mm]
  rect 0.9x0.8 smd paste+0 mask+0: 1(-0.85,0) 2(0.85,0)
  silkscreen extent 0,-0.45 0,0.45, body extent -1.4,-0.55 1.4,0.55, height 0.25
FP-RT0603-MFG [mm]
  rect 0.9x0.8 smd paste+0 mask+0: 1(-0.85,0) 2(0.85,0)
  silkscreen extent -0.85,-0.81 0.86,0.8, body extent -1.4,-0.55 1.4,0.55, height 0.25
NTCS0805_VIS [mm]
  rect 1x1.3 smd paste+0 mask+0: 1(-1,0) 2(1,0)
  Top Layer keep-out region: -0.449,-0.648 -0.449,0.648 0.449,0.648 0.449,-0.648
  silkscreen extent -0.22,-0.83 0.22,0.83, body extent -1.1,-0.7 1.1,0.7, height 0.94
PG-TO263-7-3_3 [mm]
  rect 0.8x4.6 smd: 1(-3.81,-9.15) 2(-2.54,-9.15) 3(-1.27,-9.15) 5(1.27,-9.15) 6(2.54,-9.15) 7(3.81,-9.15)
  rect 10.8x9.4 smd: 8(0,0)
  silkscreen extent -5,-11.28 5,-5.43, body extent -5,-10.84 5,4.11, height 4.4
POWERPAD [mm] "Power pad"
  rrect50% 10x10 all layers, no hole paste-2539.97 mask+0.102: P?(0,0)
RESC1608X55X25LL10T15 [mm] "Chip Resistor, 2-Leads, Body 1.60x0.80mm, IPC High Density"
  rect 0.6x0.8 smd: 1(-0.65,0) 2(0.65,0)
  body extent -0.85,-0.45 0.85,0.45, height 0.55
RESC1608X55X30LL15T15#1 [mm] "Chip Resistor, 2-Leads, Body 1.60x0.80mm, IPC High Density"
  rect 0.7x0.85 smd: 1(-0.625,0) 2(0.625,0)
  body extent -0.87,-0.48 0.87,0.48, height 0.55
RESC1608X55X30LL15T15#2 [mm] "Chip Resistor, 2-Leads, Body 1.75x0.95mm, IPC High Density"
  rect 0.75x0.85 smd: 1(-0.65,0) 2(0.65,0)
  body extent -0.87,-0.48 0.87,0.48, height 0.55
RESC1608X55X30NL15T15 [mm] "Chip Resistor, 2-Leads, Body 1.60x0.80mm, IPC Medium Density"
  rect 0.8x0.95 smd: 1(-0.675,0) 2(0.675,0)
  body extent -0.87,-0.48 0.87,0.48, height 0.55
RESC1608X55X30NL20T20 [mm] "Chip Resistor, 2-Leads, Body 1.60x0.80mm, IPC Medium Density"
  rect 0.9x1 smd: 1(-0.65,0) 2(0.65,0)
  body extent -0.9,-0.5 0.9,0.5, height 0.55
RESC1609X55X30ML15T15 [mm] "Chip Resistor, 2-Leads, Body 1.75x0.95mm, IPC Low Density"
  rect 1.15x1.05 smd: 1(-0.85,0) 2(0.85,0)
  body extent -0.87,-0.48 0.87,0.48, height 0.55
SOT-223-DB3_N [mm] "SOT223, 4-Leads, Body 6.5x3.5mm, Pitch 2.3mm, Lead Span 7mm, IPC Medium Density"
  rect 2.2x1 smd: 1(-3,2.3) 2(-3,0) 3(-3,-2.3)
  rect 2.2x3.3 smd: 4(3,0)
  silkscreen extent -3.12,-3.35 1.6,3.47, body extent -1.85,-3.35 1.85,3.35, height 1.8
"TEST POINT" [mm] "referrence point"
  round 1.2 smd paste-2539.97: TP?(-2.794,-5.588)
  body extent -3.39,-6.19 -2.19,-4.99, height 0.03
WL-SMCW_0603_150060xx75000 [mm] "SMD Mono-color Chip LED, body 1.6x0.8mm"
  rect 0.8x0.8 smd: 1(-0.8,0) 2(0.8,0)
  silkscreen extent -1.55,-0.4 -1.4,0.4, body extent -0.8,-0.4 0.8,0.4, height 0.7
WSLP27265L000FEA [mm]
  rect 2.44x5.6 smd: 1(-2.48,-0.89) 2(2.48,-0.89)
  rect 2.44x0.89 smd: 3(-2.48,3.245) 4(2.48,3.245)
  silkscreen extent -5.7,-0.75 -5.6,-0.65, body extent -3.48,-2.99 3.42,3.61, height 2.79

## Part data
C1 C2 C23 C26: library part CMP-2000-07546-2, "Cap Ceramic 100nF 50V X7R 10% Pad SMD 0603 +125°C Automotive T/R", Capacitance=100nF, Case Code (Imperial)=0603, Case Code (Metric)=1608, Dielectric=X7R, Max Operating Temperature=125°C, Min Operating Temperature=-55°C, Package Quantity=1, Ratings=AEC-Q200, Tolerance=10%, Voltage=50V, Case/Package=0603, Composition=Ceramic, Depth=0.8mm, Height=0.8mm, Lead Free="Lead Free", Length=1.6mm, Mount="Surface Mount", Packaging="Tape and Reel", Radiation Hardening=No, REACH SVHC="No SVHC", Termination=SMD/SMT, Thickness=0.035inch, Voltage Rating=50V, Voltage Rating (DC)=50V, Weight=7.1E-05oz, Width=0.8mm
C3 C4: library part CMP-2006-02610-1, Manufacturer=Murata, Part Number=GRM1885C1H150JA01D
C5 C6 C7 C8 C9 C10 C11 C12 C30 C31 C32 C33 C34 C44 C45 C46: library part CMP-2006-02836-2, "Chip Multilayer Ceramic Capacitors for General Purpose, 0603, 2.2uF, X7R, 15%, 10%, 10V", Capacitance=2.2uF, Case Code (Imperial)=0603, Case Code (Metric)=1608, Dielectric=X7R, Max Operating Temperature=125°C, Min Operating Temperature=-55°C, Package Quantity=1, Tolerance=10%, Voltage=10V, Case/Package=0603, Depth=0.8mm, Height=0.8mm, Lead Free="Lead Free", Length=1.6mm, Material=Ceramic, Mount="Surface Mount", Number of Pins=2, Packaging="Cut Tape", REACH SVHC="No SVHC", Termination=SMD/SMT, Thickness=0.035inch, Voltage Rating=10V, Voltage Rating (DC)=10V, Weight=7.1E-05oz, Width=0.031inch
C13 C14 C15 C16: library part CMP-1035-02202-3, "C0603C 4.7nF Ceramic Multilayer Capacitor; 50 VDC; +125degC; X7R Dielec; +/-5%", Capacitance="4,700 pF", Manufacturer=KEMET, Package=C0603C-CF, Temperature="-55°C to +125°C", Temperature Characteristic=X7R, Temperature Coefficient=30ppm/°C, Temperature Range High=+125°C, Temperature Range Low=-55°C, Tolerance=0.05, Voltage Rating="50 V", Automotive=Yes, Automotive Grade="Grade 1", Category=Cap, ComponentLink2Description=Datasheet, ComponentLink2URL=https://api.kemet.com/component-edge/download/datasheet/C0603C100J5GACAUTO.pdf, Device Class L1="Passive Components", Device Class L2=Capacitors, Device Class L3="Ceramic Capacitors", Digikey Description="C0603C 4.7nF Ceramic Multilayer Capacitor; 50 VDC; +125degC; X7R Dielec; +/-5%", Height=0.87mm, Lead Free=Yes, Manufacturer Part Number=C0603C472J5RACTU, Material=Ceramic, Mouser Description="Multilayer Ceramic Capacitors MLCC - SMD/SMT 50volts 4700pF X7R 5%", Octopart=https://octopart.com/c0603c472j5ractu-kemet-107195, RoHS=TRUE
C17 C18 C19 C20 C28 C29 C35 C37: library part CMP-2000-07458-2, "CAP CER 10UF 63V X7R 1210", Capacitance=10uF, Case Code (Imperial)=1210, Case Code (Metric)=3225, Dielectric=X7R, Dielectric Material=Ceramic, Max Operating Temperature=125°C, Min Operating Temperature=-55°C, Package Quantity=1000, Tolerance=10%, Voltage=63V, Case/Package=1210, Depth=2.5mm, Height=2.5mm, Lead Free="Lead Free", Length=3.2mm, Material=Ceramic, Mount="Surface Mount", Packaging="Tape and Reel", REACH SVHC="No SVHC", RoHS Compliant=Yes, Termination=SMD/SMT, Thickness=0.106inch, Voltage Rating=63V, Voltage Rating (DC)=63V, Weight=0.00388oz, Width=2.5mm
C21 C22: library part CMP-2000-05460-2, "Multilayer Ceramic Capacitors 15uF ±20% 100V X7S SMD 2220", Capacitance=15uF, Case Code (Imperial)=2220, Case Code (Metric)=5750, Dielectric=X7S, Max Operating Temperature=125°C, Min Operating Temperature=-55°C, Package Quantity=1, Resistor Type=Ceramic, Tolerance=20%, Voltage Rating=100V, Case/Package=2220, Depth=5mm, Height=2.5mm, Lead Free="Lead Free", Length=0.224inch, Mount="Surface Mount", Packaging="Tape and Reel", REACH SVHC="No SVHC", RoHS Compliant=Yes, Series=C, Termination=SMD/SMT, Thickness=0.11inch, Voltage Rating (DC)=100V, Weight=0.016932oz, Width=0.197inch
C24 C25 C27: library part CMP-2007-03262-2, "CAP CER 0.22UF 100V 10% X7R 0805", Capacitance="0.22 μF", Manufacturer=KEMET, Package=C0805C-DN, Temperature="-55°C to +125°C", Temperature Characteristic=X7R, Temperature Coefficient=30ppm/°C, Temperature Range High=+125°C, Temperature Range Low=-55°C, Tolerance=0.1, Voltage Rating="100 V", Automotive=No, Category=Cap, ComponentLink2Description=Datasheet, ComponentLink2URL=https://content.kemet.com/datasheets/KEM_C1003_C0G_SMD.pdf, Device Class L1="Passive Components", Device Class L2=Capacitors, Device Class L3="Ceramic Capacitors", Digikey Description="CAP CER 0.22UF 100V 10% X7R 0805", Height=0.88mm, Ipc Land Pattern Name=CAPC200125X78, Lead Free=Yes, Manufacturer Part Number=C0805C224K1RACTU, Material=Ceramic, Mouser Description="0805 C 220nF Ceramic Multilayer Capacitor, 100 V, +125degC, X7R Dielec, +/-10%", Octopart=https://octopart.com/c0805c224k1ractu-kemet-12818106, RoHS=TRUE
C36 C43: library part CMP-2000-05259-2, "CAP CER 100UF 6.3V X5R 1210", 3DS Part Number=220-00002, Capacitance=100uF, Manufacturer=Murata, Package=GRM32-0.3, Temperature="-55°C to +85°C", Temperature Characteristic=X5R, Temperature Coefficient=15%, Temperature Range High=+85°C, Temperature Range Low=-55°C, Tolerance=20%, Voltage=6.3V, Automotive=No, Category=Cap, ComponentLink2Description=Datasheet, ComponentLink2URL=https://search.murata.co.jp/Ceramy/image/img/A01X/G101/ENG/GRM32ER60J107ME20-01.pdf, Device Class L1="Passive Components", Device Class L2=Capacitors, Device Class L3="Ceramic Capacitors", Digikey Description="CAP CER 100UF 6.3V X5R 1210", Height=2.7mm, Ipc Land Pattern Name=CAPC320250X250, Lead Free=Yes, Manufacturer Part Number=GRM32ER60J107ME20L, Material=Ceramic, Octopart=https://octopart.com/grm32er60j107me20l-murata-197007, RoHS=TRUE, Voltage Rating=6.3V
C38: library part CMP-2006-03259-2, "CAP CER 6800PF 50V 5% NP0 0603", Capacitance="6,800 pF", Manufacturer=KEMET, Package=C0603C-CF, Temperature="-55°C to +125°C", Temperature Characteristic=C0G, Temperature Coefficient=30ppm/°C, Temperature Range High=+125°C, Temperature Range Low=-55°C, Tolerance=0.05, Voltage Rating="50 V", Automotive=Yes, Automotive Grade="Grade 1", Category=Cap, ComponentLink2Description=Datasheet, ComponentLink2URL=https://api.kemet.com/component-edge/download/datasheet/C0603C100J5GACAUTO.pdf, Device Class L1="Passive Components", Device Class L2=Capacitors, Device Class L3="Ceramic Capacitors", Digikey Description="CAP CER 6800PF 50V 5% NP0 0603", Height=0.87mm, Lead Free=Yes, Manufacturer Part Number=C0603C682J5GACTU, Material=Ceramic, Mouser Description="Multilayer Ceramic Capacitors MLCC - SMD/SMT 50volts 6800pF 5% C0G", Octopart=https://octopart.com/c0603c682j5gactu-kemet-12793182, RoHS=TRUE
C39 C41: library part CMP-06035-056041-1, "Chip Multilayer Ceramic Capacitors for General Purpose, 0603, 2200pF, C0G, 30ppm/°C, 5%, 50V", Capacitance=2.2nF, Case Code (Imperial)=0603, Case Code (Metric)=1608, Dielectric=C0G, Dielectric Material=Ceramic, Insulation Resistance=10GR, Max Operating Temperature=125°C, Min Operating Temperature=-55°C, Package Quantity=1, Temperature Coefficient=30ppm/°C, Tolerance=5%, Voltage=50V, Case/Package=0603, Depth=0.8mm, Height=0.8mm, Lead Free="Lead Free", Length=1.6mm, Material=Ceramic, Mount="Surface Mount", Number of Pins=2, Packaging="Tape and Reel", Radiation Hardening=No, REACH SVHC="No SVHC", Termination=SMD/SMT, Thickness=0.035inch, Voltage Rating=50V, Voltage Rating (DC)=50V, Width=0.8mm
C40: library part CMP-2006-03074-1, Manufacturer=Kemet, Part Number=C0603C121J5GACTU
C42: library part CMP-2006-02910-1, Manufacturer=Murata, Part Number=GRM188R71H223KA01D
C47 C48 C49: library part CMP-05427-000067-1, "CAP ALUM 100UF 20% 63V SMD", Capacitance=100uF, Case/Package=Radial, Dielectric Material=Aluminium, ESR (Equivalent Series Resistance)=350mR, Leakage Current=3uA, Max Operating Temperature=105°C, Min Operating Temperature=-55°C, Package Quantity=1, Ripple Current=400mA, Tolerance=20%, Voltage=63V, Construction=Cylindrical, Contact Plating=Tin, Diameter=10mm, Height=10.2mm, Height - Seated (Max)=0.413inch, Impedance=350mR, Lead Free="Lead Free", Length=10.2mm, Life (Hours)=2000Hour, Material=Aluminium, Mount="Surface Mount", Packaging="Tape and Reel", Polarity=Polar, Radiation Hardening=No, REACH SVHC="No SVHC", Ripple Current (AC)=400mA, RoHS Compliant=Yes, Series=FK, Termination=SMD/SMT, Voltage Rating=63V, Voltage Rating (DC)=63V, Width=12mm
D1: library part CMP-22017-000005-2, "LED GREEN CLEAR CHIP SMD", Case Code (Imperial)=0603, Case Code (Metric)=1608, Color=Green, Forward Current=30mA, Forward Voltage=2.1V, Lens Color=Colorless, Max Operating Temperature=85°C, Min Operating Temperature=-55°C, Package Quantity=1, Power Dissipation=100mW, Reverse Voltage=5V, Test Current=10mA, Voltage=2V, Case/Package=0603, Depth=0.8mm, Dominant Wavelength=569nm, Height=0.8mm, Illumination Color=Green, Lead Free="Lead Free", Length=1.6mm, Lens Style=Clear, Lens Transparency=Clear, Luminous Intensity=6mcd, Mount="Surface Mount", Number of Elements=1, Number of LEDs=1, Number of Pins=2, Packaging="Tape and Reel", Power Rating=100mW, Radiation Hardening=No, Viewing Angle=130°, Wavelength=565nm, Width=0.8mm
D2: library part CMP-22017-000008-1, "LED BLUE CLEAR CHIP SMD", Case Code (Imperial)=0603, Case Code (Metric)=1608, Color=Blue, Forward Current=20mA, Forward Voltage=3.8V, Lens Color=Colorless, Max Operating Temperature=80°C, Max Power Dissipation=75mW, Min Operating Temperature=-20°C, Package Quantity=1, Power Dissipation=76mW, Reverse Voltage=5V, Case/Package=0603, Depth=1.6mm, Dominant Wavelength=475nm, Height=0.55mm, Illumination Color=Blue, Lead Free="Lead Free", Length=0.8mm, Lens Style=Diffused, Lens Transparency=Clear, Luminous Intensity=180mcd, Mount="Surface Mount", Number of Elements=1, Number of LEDs=1, Number of Pins=2, Packaging="Tape and Reel", Radiation Hardening=No, Test Current=20mA, Viewing Angle=130°, Wavelength=468nm, Width=0.8mm
D3: library part CMP-1426-00001-3, Case Code (Imperial)=0603, Case Code (Metric)=1608, Color=Red, Forward Current=100mA, Forward Voltage=2V, Max Junction Temperature (Tj)=95°C, Max Operating Temperature=85°C, Max Reverse Voltage (DC)=5V, Min Operating Temperature=-40°C, Power Dissipation=72mW, Test Current=20mA, Case/Package=0603, Dominant Wavelength=625nm, Height=700µm, Length=1.6mm, Lens Style="Clear, Rectangular", Luminous Intensity=250mcd, Mount="Surface Mount", NexarPartId=29717776, Packaging="Tape and Reel", Peak Wavelength=630nm, REACH SVHC=Unknown, Reverse Voltage=5V, RoHS=Compliant, Viewing Angle=140°, Wavelength=625nm, Width=800µm
D4: "Schottky Diode", Manufacturer_Name="Diodes Incorporated", Mouser Part Number=621-B280-13-F, Arrow Part Number=B280-13-F, Arrow Price/Stock=https://www.arrow.com/en/products/b280-13-f/diodes-incorporated, Datasheet Link=https://www.diodes.com/assets/Datasheets/ds30021.pdf, Height=2.5mm, Manufacturer_Part_Number=B280-13-F, Mouser Price/Stock=https://www.mouser.com/Search/Refine.aspx?Keyword=621-B280-13-F
D5: library part CMP-02577-000008-1, "TVS DIODE 5V 9.2V DO214AB", Breakdown Voltage=6.4V, Clamping Voltage=9.2V, Manufacturer="Vishay Semiconductor Diodes Division", Max Junction Temp=+150°C, Package=95402, Peak Pulse Current=163A, Peak Pulse Power=1500W, Reverse Standoff Voltage=5V, Temperature="-55°C to +150°C", Temperature Range Low=-55°C, Automotive=No, Category=Diode, ComponentLink2Description=Datasheet, ComponentLink2URL=https://www.vishay.com/docs/88394/smcj.pdf, Device Class L1="Circuit Protection", Device Class L2="TVS Diodes", Device Class L3=unset, Digikey Description="TVS DIODE 5V 9.2V DO214AB", Direction=Unidirectional, Footprint Url=https://www.vishay.com/docs/95402/smc.pdf, Height=2.62mm, Lead Free=Yes, Manufacturer Part Number=SMCJ5.0A-E3/57T, Mouser Description="TVS Diodes - Transient Voltage Suppressors 1500W 5.0V Unidirect", Number Of Channels=1, Octopart=https://octopart.com/smcj5.0a-e3%2F57t-vishay-39559239, RoHS=TRUE, Standoff Height=0mm, Temperature Range High=+150°C
J1: library part CMP-2000-05246-2, "CONN RCPT USB2.0 MICRO B SMD R/A", Current Rating=1.8A, Manufacturer=Molex, Package=0, Temperature="-30°C to +85°C", Temperature Range High=+85°C, Temperature Range Low=-30°C, Voltage Rating=30V, Automotive=No, Category=Conn, ComponentLink2Description=Datasheet, ComponentLink2URL=https://www.molex.com/webdocs/datasheets/pdf/en-us/0473460001_IO_CONNECTORS.pdf, Conn Orientation="Right Angle", Contact Material=Gold,Nickel, Device Class L1=Connectors, Device Class L2="USB Connectors", Device Class L3=unset, Digikey Description="CONN RCPT USB2.0 MICRO B SMD R/A", Footprint Url=https://www.molex.com/pdm_docs/sd/473460001_sd.pdf, Height=2.945mm, Is Female=yes, Lead Free=Yes, Manufacturer Part Number=473460001, Number Of Contacts=5, Octopart=https://octopart.com/47346-0001-molex-7164928, Pitch=0.65mm, RoHS=TRUE, Shielding=true, Usb Standard="USB 2.0"
J2: library part CMP-17439-000014-3, "CONN HEADER VERT 3POS 2.5MM", Color=Natural, Contact Resistance=20mR, Current Rating=3A, Flammability Rating="UL94 V-0", Housing Color=White, Insulation Resistance=1GR, Max Operating Temperature=85°C, Max Voltage Rating (AC)=250V, Min Operating Temperature=-25°C, Connector Type=Header, Contact Finish - Mating=TIN, Contact Material=Brass, Contact Plating=Tin, Contact Shape=Square, Contact Type="Male Pin", Depth=5.75mm, Fastening Type=Detent, Gender=Male, Housing Material=Polyamide, Insulation Color=Natural, Insulation Material=Nylon, Lead Free="Lead Free", Lead Pitch=2.5mm, Length=9.9mm, Max Current Rating=3A, Max Voltage Rating (DC)=250V, Mount="Through Hole", Number Of Contacts=3, Number of Positions=3, Number of Rows=1, Orientation=Straight, Packaging=Bulk, Pitch=2.5mm, REACH SVHC="No SVHC", Series=XH, Termination=Solder, Voltage Rating=250V, Voltage Rating (AC)=250V, Wire/Cable Gauge=22AWG
J3: library part CMP-17439-000076-1, "CONN HEADER VERT 6POS 2.5MM"
J4: library part CMP-17439-000250-1, "CONN HEADER VERT 4POS 2.5MM", Color=Natural, Contact Resistance=20mR, Current Rating=3A, Flammability Rating="UL94 V-0", Housing Color=White, Insulation Resistance=1GR, Max Operating Temperature=85°C, Max Voltage Rating (AC)=250V, Min Operating Temperature=-25°C, Package Quantity=500, Connector Type=Header, Contact Finish - Mating=TIN, Contact Material=Brass, Contact Plating=Tin, Contact Shape=Square, Contact Type="Male Pin", Depth=5.75mm, Fastening Type=Detent, Gender=Male, Housing Material=Polyamide, Insulation Color=Natural, Insulation Material=Nylon, Lead Free="Lead Free", Lead Pitch=2.5mm, Length=12.4mm, Mated Stacking Heights=9.8mm, Material=Polyamide, Max Current Rating=3A, Max Voltage Rating (DC)=250V, Mount="Through Hole", Number Of Contacts=4, Number of Positions=4, Number of Rows=1, Orientation=Straight, Packaging=Bulk, Pitch=2.5mm, REACH SVHC="No SVHC", Series=XH, Termination=Solder, Voltage Rating=250V, Voltage Rating (AC)=250V, Wire/Cable Gauge=22AWG
J5: library part CMP-17439-000323-2, "CONN HEADER VERT 7POS 2.5MM", Color=Natural, Contact Resistance=20mR, Current Rating=3A, Flammability Rating="UL94 V-0", Housing Color=White, Insulation Resistance=1GR, Max Operating Temperature=85°C, Max Voltage Rating (AC)=250V, Min Operating Temperature=-25°C, Connector Type=Header, Contact Finish - Mating=TIN, Contact Material=Brass, Contact Plating=Tin, Contact Shape=Square, Contact Type="Male Pin", Depth=5.75mm, Fastening Type=Detent, Housing Material=Polyamide, Insulation Color=Natural, Insulation Material=Nylon, Lead Free="Lead Free", Lead Pitch=2.5mm, Length=19.9mm, Mated Stacking Heights=9.8mm, Max Current Rating=3A, Mount="Through Hole", Number Of Contacts=7, Number of Positions=7, Number of Rows=1, Orientation=Straight, Packaging=Bulk, Pitch=2.5mm, REACH SVHC="No SVHC", Series=XH, Termination=Solder, Voltage Rating=250V, Voltage Rating (AC)=250V, Wire/Cable Gauge=22AWG
J6: library part CMP-17439-000304-1, "CONN HEADER VERT 5POS 2.5MM", Color=Green, Contact Resistance=20mR, Flammability Rating="UL94 V-0", Housing Color=White, Insulation Color=Natural, Max Current Rating=3A, Max Operating Temperature=85°C, Max Voltage Rating (AC)=250V, Min Operating Temperature=-25°C, Connector Type=Header, Contact Finish - Mating=TIN, Contact Material=Brass, Contact Plating=Copper, Contact Shape=Square, Contact Type="Male Pin", Depth=5.75mm, Fastening Type=Detent, Housing Material=Polyamide, Insulation Material=Nylon, Lead Free="Lead Free", Length=14.9mm, Mated Stacking Heights=9.8mm, Mount="Through Hole", Number of Positions=5, Number of Rows=1, Orientation=Straight, Packaging=Bulk, Pitch=2.5mm, Series=XH, Termination=Solder, Voltage Rating=250V
L1: library part CMP-14484-000872-1, "Shielded Wirewound Inductor 22uH 20% 1.5A 0.1495Ω SMD", Case/Package=Nonstandard, Current Rating=1.5A, DC Resistance (DCR)=149.5mR, Inductance=22uH, Inductance Tolerance=20%, Max Operating Temperature=120°C, Min Operating Temperature=-25°C, Package Quantity=1500, Resistor Type=Wirewound, Saturation Current=1.9A, Self Resonant Frequency=7MHz, Test Frequency=100kHz, Core Material=Ferrite, Halogen Free="Halogen Free", Height=4.5mm, Height - Seated (Max)=0.177inch, Length=0.236inch, Max DC Current=1.5A, Mount="Surface Mount", Number of Pins=2, Packaging="Tape and Reel", RMS Current (Irms)=1.5A, RoHS Compliant=Yes, Series=NR, Shielding=Shielded, Termination=SMD/SMT, Tolerance=20%, Width=0.236inch
Q1 Q2 Q3 Q4 Q5 Q6: "MOSFET (N-Channel)", Manufacturer_Name=Infineon, Mouser Part Number=726-IPB010N06N, Datasheet Link=https://www.infineon.com/dgdl/Infineon-IPB010N06N-DS-v02_04-EN.pdf?fileId=db3a3043353fdc1601355341f17a485f, Manufacturer_Part_Number=IPB010N06N, Mouser Price/Stock=https://www.mouser.co.uk/ProductDetail/Infineon-Technologies/IPB010N06N?qs=EUA%2Fg8wssK3txpgcjG7wiw%3D%3D
R1 R4 R8 R9 R10 R15 R29 R30 R31: library part CMP-2000-04423-2, "RES 2.20K OHM 1/10W .1% SMD 0603", Manufacturer=Yageo, Package=RT0603, Power Rating=0.1W, Resistance=2.2KΩ, Temperature="-55°C to +155°C", Temperature Coefficient="25 ppm/°C", Temperature Range High=+155°C, Temperature Range Low=-55°C, Tolerance=0.001, Voltage Rating=75V, Automotive=No, Category=Res, ComponentLink2Description=Datasheet, ComponentLink2URL=http://www.yageo.com/documents/recent/PYu-RT_1-to-0.01_RoHS_L_9.pdf, Composition="Thin Film", Device Class L1="Passive Components", Device Class L2=Resistors, Device Class L3="Chip SMD Resistors", Digikey Description="RES 2.20K OHM 1/10W .1% SMD 0603", Footprint Url=http://www.yageo.com/exep/pages/download/literatures/PYu-R_Mount_10.pdf, Height=0.55mm, Ipc Land Pattern Name=RESC16080X45, Lead Free=Yes, Manufacturer Part Number=RT0603BRD072K2L, Mouser Description="High Precision-High Stability Chip Resistor Thin Film 0603 2.2kOhm 0.1% Paper T/R", Octopart=https://octopart.com/rt0603brd072k2l-yageo-1186019, RoHS=TRUE, Series=RT
R2 R3: library part CMP-2000-03097-2, "RES Thick Film, 22Ω, 1%, 0.1W, 100ppm/°C, 0603", Case Code (Imperial)=0603, Case Code (Metric)=1608, Max Operating Temperature=155°C, Min Operating Temperature=-55°C, Package Quantity=5000, Power Rating=100mW, Resistance=22R, Temperature Coefficient=100ppm/°C, Tolerance=1%, Voltage Rating=75V, Case/Package=0603, Composition="Thick Film", Contact Plating=Tin, Depth=0.85mm, Height=0.45mm, Lead Free="Lead Free", Length=1.55mm, Military Standard=Not, Mount="Surface Mount", Packaging="Tape and Reel", Radiation Hardening=No, Termination=SMD/SMT, Voltage Rating (DC)=75V, Weight=7.1E-05oz, Width=0.85mm
R5 R6 R16 R19 R21 R22: library part CMP-2100-03663-2, Case Code (Imperial)=0603, Max Operating Temperature=155°C, Min Operating Temperature=-55°C, Power Rating=100mW, Resistance=100Ω, Temperature Coefficient=100ppm/°C, Tolerance=1%, Voltage Rating=50V, Case Code (Metric)=0603, Case/Package=0603, Composition="Thick Film", Depth=800µm, Height=450µm, Lead Free="Lead Free", Length=1.6mm, Military Standard=Not, NexarPartId=55402879, Number of Pins=2, Packaging="Tape & Reel", REACH SVHC=Unknown, RoHS=Compliant, Schedule B="8533210045, 8533210045", Termination=SMD/SMT, Voltage Rating (DC)=50V, Width=800µm
R7 R11 R12 R13 R20 R35: library part CMP-2000-00874-2, "RES SMD 10K OHM 0.1% 1/10W 0603", Case Code (Imperial)=0603, Case Code (Metric)=1608, Max Operating Temperature=155°C, Max Power Dissipation=100mW, Min Operating Temperature=-55°C, Package Quantity=5000, Resistance=10kR, Resistance Tolerance=0.1%, Resistor Type="Thin Film", Temperature Coefficient=25ppm/°C, Voltage Rating=75V, Case/Package=0603, Construction=Rectangular, Contact Plating=Tin, Depth=0.8mm, Height=0.45mm, Lead Free="Lead Free", Length=1.6mm, Military Standard=Not, Mount="Surface Mount", Number of Pins=2, Number of Terminations=2, Packaging="Tape and Reel", Power Rating=100mW, Radiation Hardening=No, REACH SVHC="No SVHC", RoHS Compliant=Yes, Series=ERA-3A, Size Code=0603, Technology="METAL FILM", Termination=SMD/SMT, Tolerance=0.1%, Voltage Rating (DC)=75V, Width=0.8mm
R14 R26 R27 R28 R39 R40 R41: library part CMP-2000-06940-1, "Chip Resistor, 39 KOhm, +/- 1%, 0.1 W, -55 to 155 degC, 0603 (1608 Metric), RoHS, Tape and Reel", Case Code - in=0603, Case Code - mm=1608, Manufacturer=Yageo, Operating Temperature Range=-55Cto+155C, Package Description="2-Pin Surface Mount Device, Body 1.6 x 0.8 mm", Power Rating=100mW, Resistance=39kOhms, Temperature Coefficient=100PPM/C, Tolerance=1%, Voltage Rating=50V, Datasheet URL=http://www.yageo.com/documents/recent/PYu-RC_Group_51_RoHS_L_7.pdf, Datasheet Version="Rev. 7, 05/2017", Manufacturer URL=http://www.yageo.com/, Mounting Technology=SurfaceMount, Package Reference=0603, Packaging=Reel, Product=ThickFilmResistorsGeneralPurpose, Series=RC, Termination Style=SMD/SMT
R17: library part CMP-1659-00056-1, "Chip Resistor, 1 MOhm, +/- 1%, 100 mW, -55 to 155 degC, 0603 (1608 Metric), RoHS, Tape and Reel", Capacitance="1 mF", Case\Package=Radial, Max Operating Temperature="85 degC", Min Operating Temperature="-40 degC", Package Quantity=200, Tolerance=20%, Voltage Rating="25 V", ComponentLink1Description="Manufacturer URL", ComponentLink1URL=http://www.yageo.com/, ComponentLink2Description=Datasheet, ComponentLink2URL=http://www.yageo.com/documents/recent/PYu-RC_Group_51_RoHS_L_04.pdf, DatasheetVersion="Rev. 4, 02/2016", Diameter="10 mm", Height="20 mm", Lead Pitch="5 mm", Length="20 mm", Mount="Through Hole", PackageDescription="2-Pin Surface Mount Device, Body 1.6 x 0.8 mm", PackageReference=0603, Packaging=Bulk, Radiation Hardening=No, REACH SVHC="No SVHC", RoHSCompliant=true, Voltage Rating (DC)="25 V", Width="0 inch"
R18: library part CMP-2000-00258-1, Manufacturer=Panasonic, Part Number=ERJ-3EKF1502V
R23: library part CMP-2000-00749-1, Manufacturer=Panasonic, Part Number=ERJ-3GEYJ224V
R24: library part CMP-1012-00650-3, "Fixed Resistor, Metal Glaze/thick Film, 0.1W, 18000ohm, 75V, 1% +/-Tol, 100ppm/Cel, Surface Mount, 0603", Manufacturer=Panasonic, Part Number=ERJ3EKF1802V
R25: library part CMP-2000-00436-2, "Chip Resistors, 3.3 KOhm, +/- 1%, 0.1 W, 0603 (1608 Metric), -55 to 155 degC, RoHS, Tape and Reel", Case Code (Imperial)=0603, Case Code (Metric)=1608, Manufacturer=Panasonic, Max Operating Temperature=155degC, Max Power Dissipation=100mW, Min Operating Temperature=-55degC, Package Description="2-Pin Surface Mount Device, Body 1.6 x 0.85 mm", Package Quantity=1, Resistance=3.3KOhm, Temperature Coefficient=100ppm/degreesC, Tolerance=1%, Voltage Rating=75V, Case/Package=0603, Composition=ThickFilm, Contact Plating=Tin, Datasheet URL=https://industrial.panasonic.com/cdbs/www-data/pdf/RDA0000/AOA0000C283.pdf, Datasheet Version=42095.0, Depth=0.8mm, Height=0.022inch, Lead Free=LeadFree, Length=1.6mm, Manufacturer URL=http://www.panasonic.com/, Military Standard=Not, Mount=SurfaceMount, Number of Pins=2, Number of Terminations=2, Package Reference=0603, Package URL=http://www.st.com/st-web-ui/static/active/en/resource/technical/document/datasheet/CD00001320.pdf, Packaging=TapeandReel, Power Rating=100mW, Radiation Hardening=No, REACH SVHC=NoSVHC, RoHSCompliant=true, Termination=SMD/SMT, Voltage Rating (DC)=75V, Width=0.8mm
R32 R33 R34 R36 R37 R38: library part CMP-05422-000119-1, "RES SMD 4.7 OHM 5% 1/4W 0603", Case Code (Imperial)=0603, Case Code (Metric)=1608, Max Operating Temperature=155°C, Max Power Dissipation=250mW, Min Operating Temperature=-55°C, Resistance=4.7R, Resistor Type="Thick Film", Temperature Coefficient=200ppm/°C, Tolerance=5%, Case/Package=0603, Features="Automotive AEC-Q200", Height=0.018inch, Length=0.063inch, Number of Terminations=2, Packaging="Tape and Reel", Width=0.031inch
R42 R43: "Resistor", Manufacturer_Name=Vishay, Mouser Part Number=71-WSLP27265L000FEA, Datasheet Link=https://componentsearchengine.com/Datasheets/1/WSLP27265L000FEA.pdf, Height=2.81mm, Manufacturer_Part_Number=WSLP27265L000FEA, Mouser Price/Stock=https://www.mouser.co.uk/ProductDetail/Vishay-Dale/WSLP27265L000FEA?qs=h6V4JsTaLXeHJBxiH6kbIg%3D%3D
R44: library part CMP-2000-00896-1, Manufacturer=Panasonic, Part Number=ERA-3AEB121V
U1: library part CMP-0243-00156-2, "IC MCU 32BIT 1MB FLASH 64LQFP", Case/Package=LQFP, Frequency=168MHz, Max Operating Temperature=85°C, Max Power Dissipation=435mW, Max Supply Voltage=3.6V, Min Operating Temperature=-40°C, Min Supply Voltage=1.8V, Package Quantity=1000, Contact Plating=Tin, Core Architecture=ARM, Data Bus Width=32b, Height=1.45mm, Interface=I2C, Lead Free="Lead Free", Length=10mm, Max Frequency=168MHz, Memory Size=1024KB, Memory Type=FLASH, Mount="Surface Mount", Number of ADC Channels=16, Number of I2C Channels=3, Number of I/Os=51, Number of Pins=64, Number of Programmable I/O=51, Number of SPI Channels=3, Number of Timers/Counters=14, Number of UART Channels=2, Number of USB Channels=2, Oscillator Type=Internal, Packaging="Tape and Reel", Peripherals="Brown-out Detect/Reset", Radiation Hardening=No, RAM Size=196KB, Watchdog Timer=Yes, Width=10mm
U2: library part CMP-04915-000065-1, "IC MOTOR DRIVER 8V-60V 56HTSSOP", Case/Package=HTSSOP, Max Operating Temperature=125°C, Max Supply Voltage=60V, Min Operating Temperature=-40°C, Min Supply Voltage=8V, Nominal Supply Current=15mA, Output Current=1.7A, Package Quantity=2000, Interface=Parallel, Lead Free="Lead Free", Mount="Surface Mount", Number of Outputs=2, Number of Pins=56, Packaging="Tape and Reel", Radiation Hardening=No, REACH SVHC="No SVHC", RoHS Compliant=Yes, Series=DRV8302, Supply Current=15mA
U3: library part CMP-0136-00509-1, "800 mA Fixed Low Dropout Positive Regulator, 3-Pin SOT-223, Extended Temperature, Tape and Reel", DatasheetVersion="revC, Oct-2006", PackageDescription="3-Lead Plastic Small Outline Transistor (DB) [SOT-223]", PackageReference=SOT-223-DB3, PackageVersion="revBB, Aug-2009"
U4: library part CMP-00030-42801496-1, "NTCS0805E3103GMT Thermistor NTC 10K Ohm 2% 2-Pin 0805 Surface Mount Solder Pad 3570K -4 to -3.5 T/R Automotive", Case Code (Imperial)=0805, Case Code (Metric)=2012, Max Operating Temperature=150°C, Max Power Dissipation=210mW, Min Operating Temperature=-40°C, Resistance=10kΩ, Tolerance=2%, Accuracy=3%, Case/Package=0805, Contact Plating=Tin, Depth=1.25mm, Length=2mm, Mount="Surface Mount", NexarPartId=42801496, Number of Pins=2, Packaging=Digi-Reel®, Power Rating=210mW, Radiation Hardening=No, RoHS=Compliant, Schedule B="8533400080, 8533400080", Termination=SMD/SMT